# Altium PCB UpperV1.1.PcbDoc
Units mil, origin at the board's own origin, x right, y up, seen from the top; angles counter-clockwise.
Board outline 3366.33 x 5314.96 mil, 2 copper layers (Top Layer, Bottom Layer); 95 components, 77 nets, 392 pads, 49 vias.
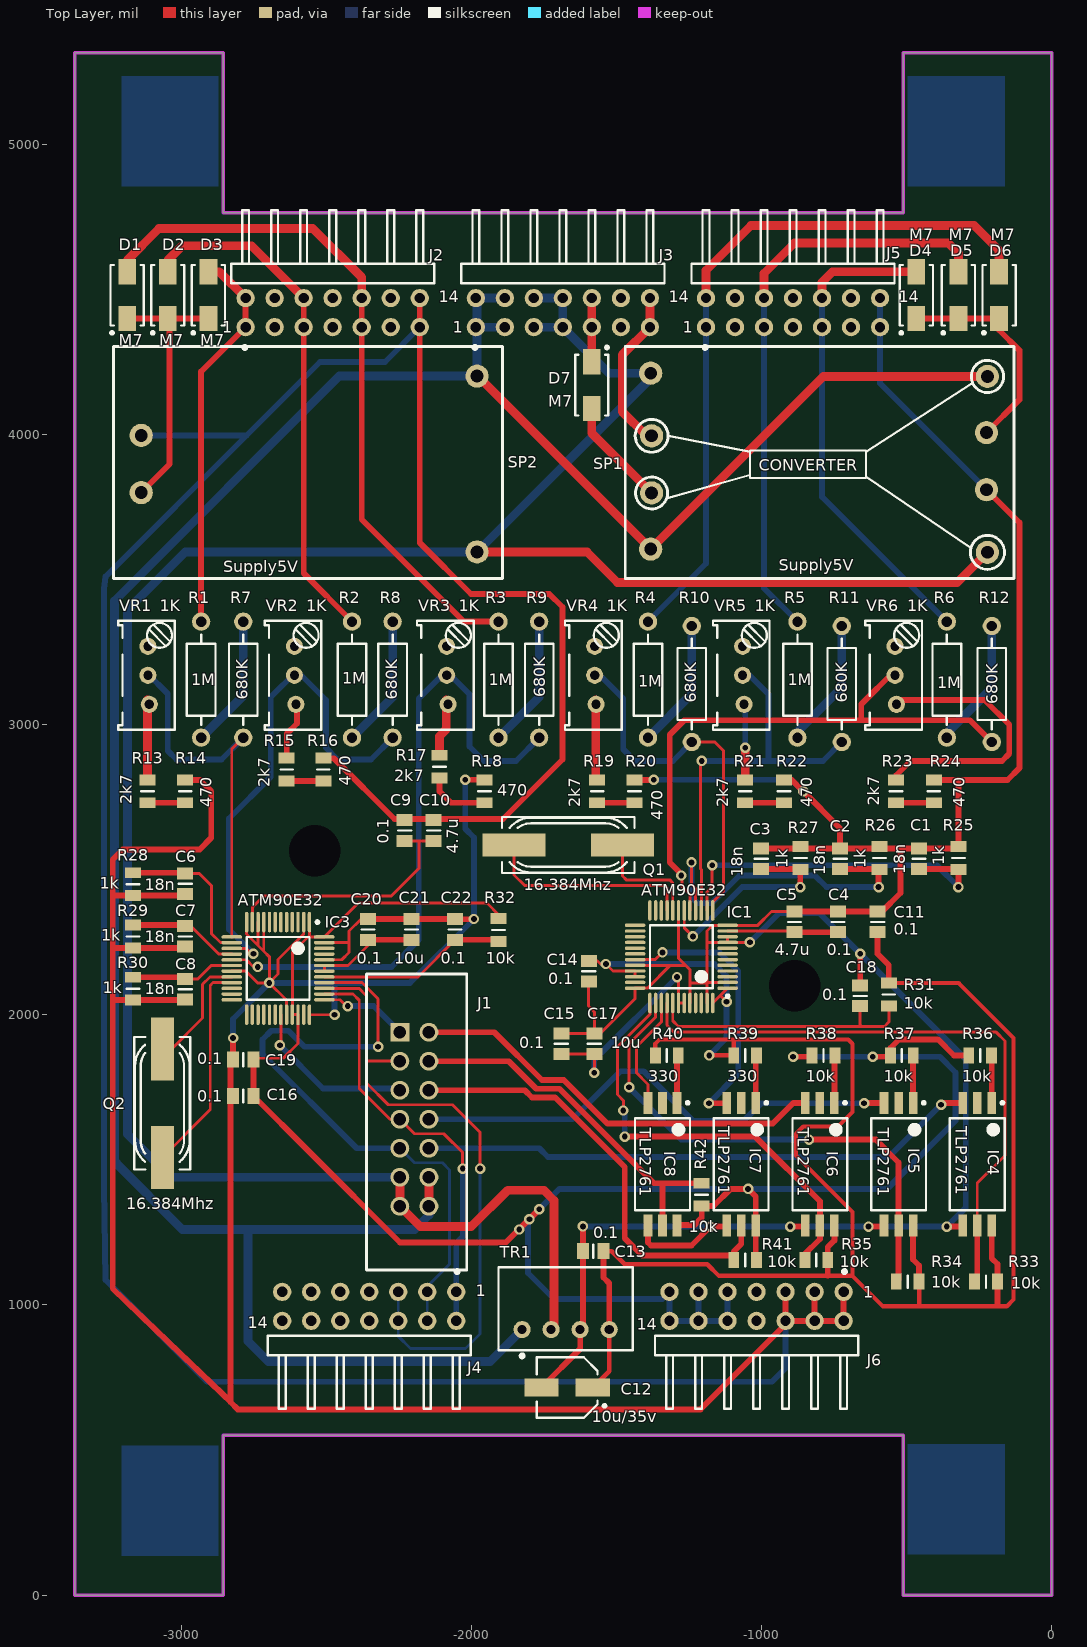
[diagram p0: Top Layer view]
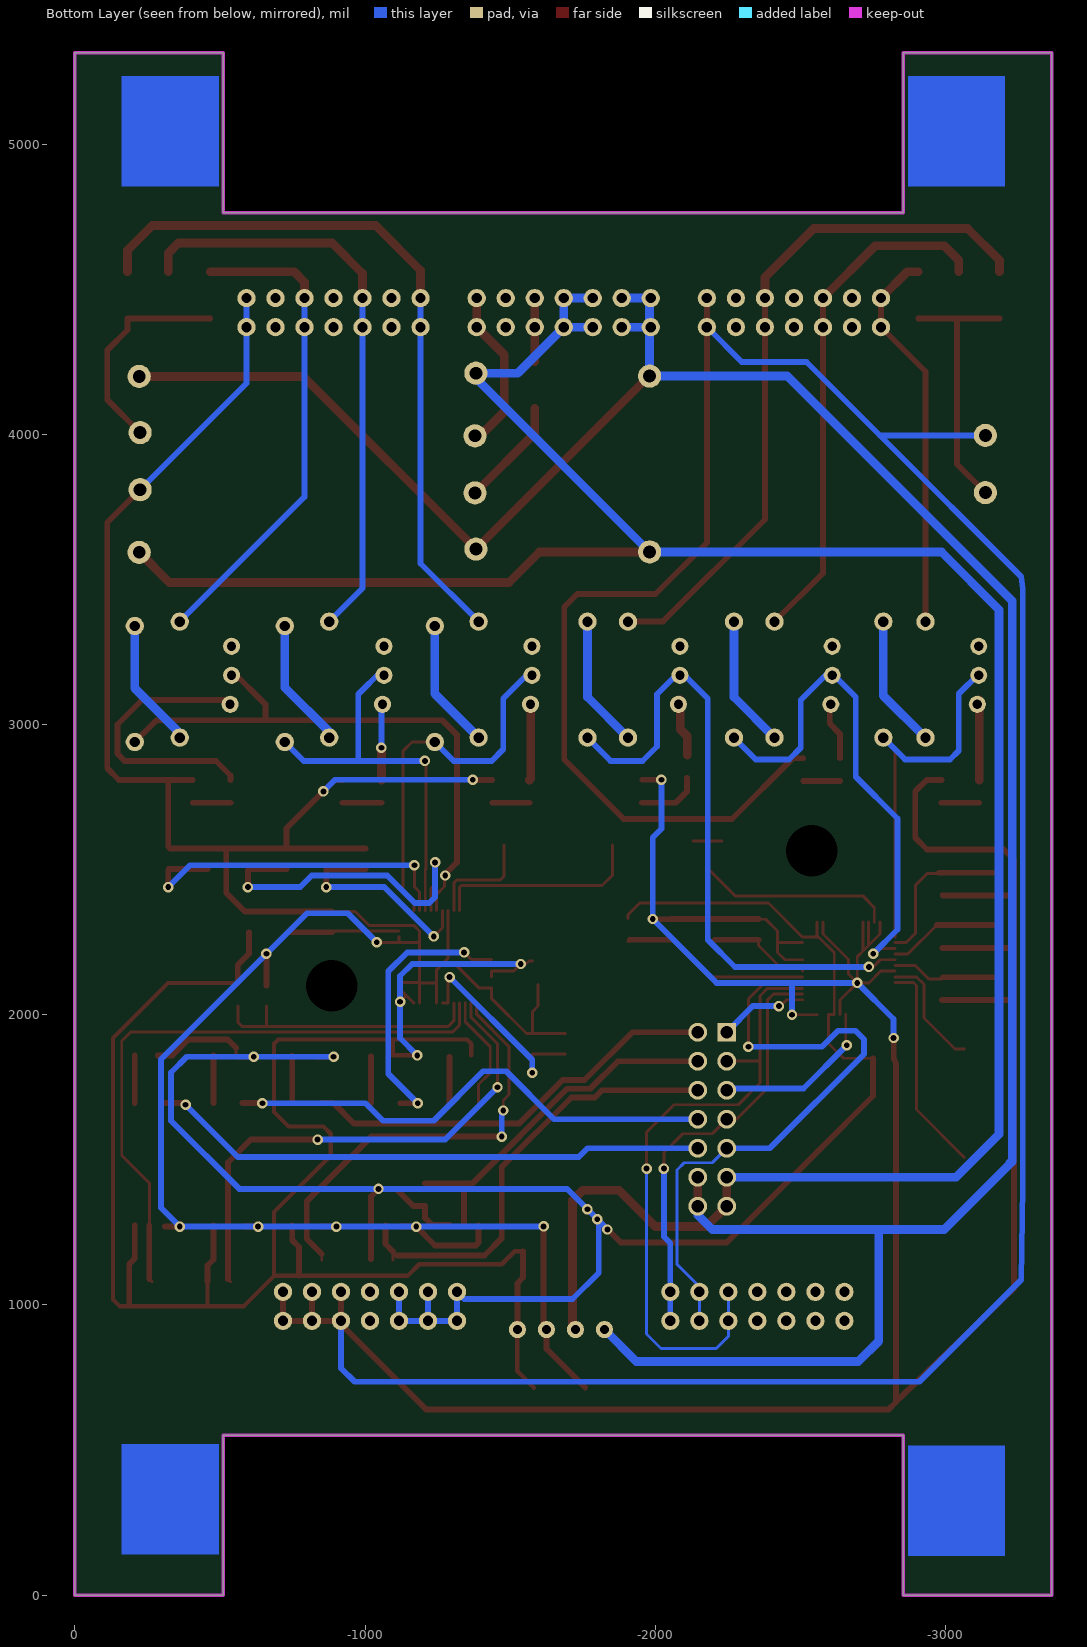
[diagram p1: Bottom Layer view, seen from below]
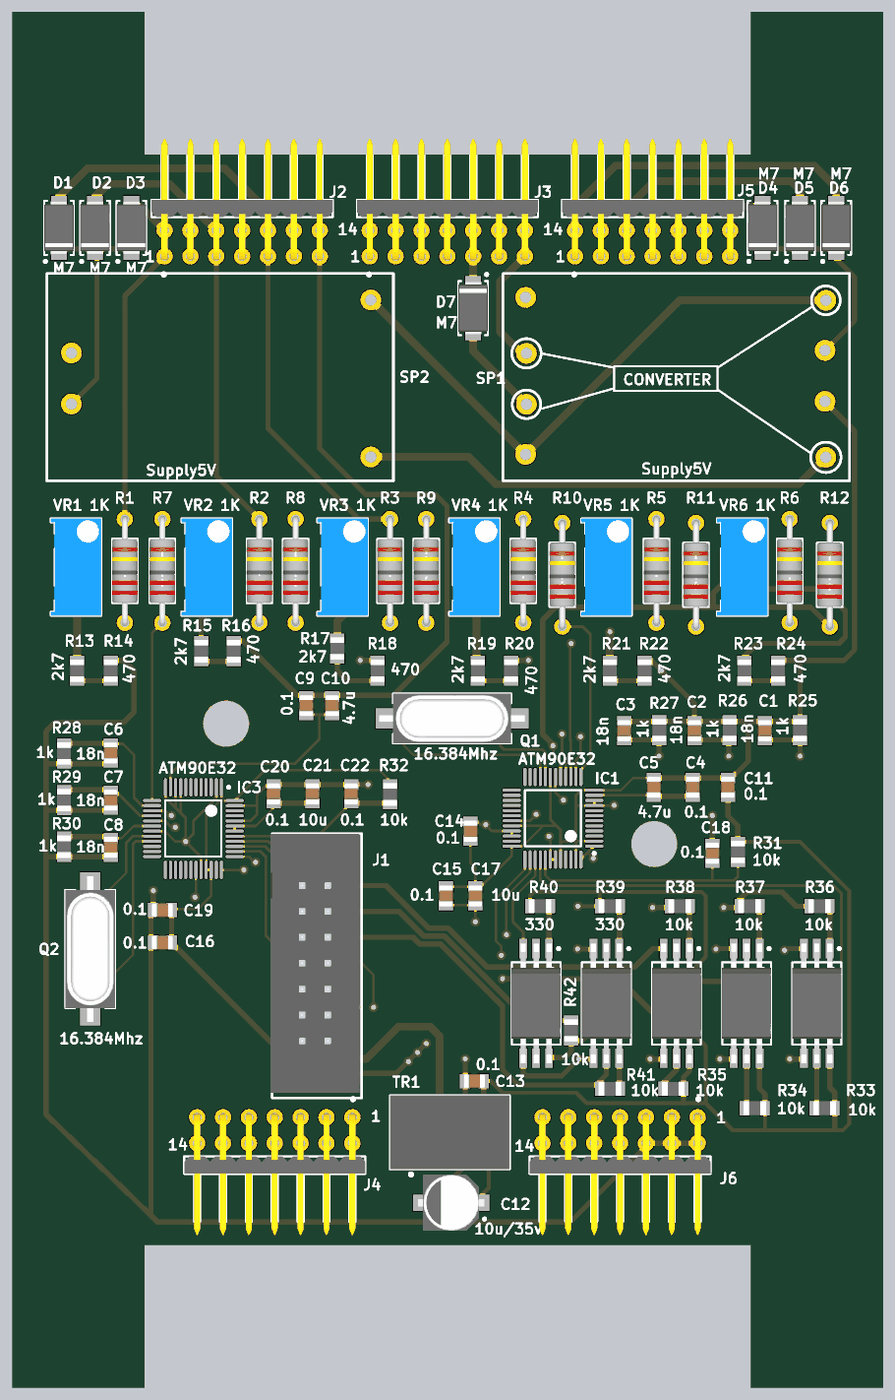
[diagram p2: 3D render of the assembled board from above, using the file's embedded part models]

## Layer stack, top to bottom
Top Solder: solder mask 0.4, Solder Resist, Dk 3.5
Top Layer: signal copper 1.4
Dielectric 1: dielectric 12.6, FR-4, Dk 4.8
Bottom Layer: signal copper 1.4
Bottom Solder: solder mask 0.4, Solder Resist, Dk 3.5

## Board outline
-3366.33,0 -3366.33,5314.96 -2854.52,5314.96 -2854.52,4763.78 -512,4763.78 -512,5314.96 0,5314.96 0,0 -511.81,0 -511.81,551.18 -2854.33,551.18 -2854.33,0

## Design rules (kind name [scope] priority, off if disabled: settings)
Clearance [All] p1: gap=7 ignorepadtopadclearanceinfootprint=FALSE
PolygonConnect [All] p1: connectstyle=Relief reliefconductorwidth=10 reliefentries=4 polygonreliefangle="90 Angle" airgapwidth=10
RoutingVias [All] p1: holewidth=28 width=50 viastyle="Through Hole" minholewidth=28 minwidth=50 maxholewidth=28 maxwidth=50
SolderMaskExpansion [All] p1: expansion=4
Width [All] p1: maxlimit=300 minlimit=7 preferedwidth=10
30 further rules are at their usual default settings.

## Components (designator, comment, footprint, x,y, rotation, side; value= is the part's Value field where it differs from the comment)
C1 "18n" CAPC2012X135N -457.33,2538.03 r270 top value=18nF
C2 "18n" CAPC2012X135N -729.33,2538.03 r270 top value=18nF
C3 "18n" CAPC2012X135N -1001.33,2538.03 r270 top value=18nF
C4 "0.1" CAPC2012X135N -736.33,2320 r90 top value=100nF
C5 "4.7u" CAPC2012X135N -886.33,2320 r270 top value=4.7uF
C6 "18n" CAPC2012X135N -2986.33,2451.97 r90 top value=18nF
C7 "18n" CAPC2012X135N -2986.33,2270 r90 top value=18nF
C8 "18n" CAPC2012X135N -2986.33,2088.03 r90 top value=18nF
C9 "0.1" CAPC2012X135N -2230,2635 r90 top value=100nF
C10 "4.7u" CAPC2012X135N -2130,2635 r270 top value=4.7uF
C11 "0.1" CAPC2012X135N -600,2320 r270 top value=100nF
C12 "10u/35v" CAPAE530X540N -1670,715 r180 top value=10uF
C13 "0.1" CAPC2012X135N -1580,1185 r180 top value=100nF
C14 "0.1" CAPC2012X135N -1595,2150 r270 top value=100nF
C15 "0.1" CAPC2012X135N -1690,1900 r270 top value=100nF
C16 "0.1" CAPC2012X135N -2786.33,1720 r0 top value=100nF
C17 "10u" CAPC2012X135N -1576.33,1900 r90 top value=10uF
C18 "0.1" CAPC2012X135N -660,2065 r270 top value=100nF
C19 "0.1" CAPC2012X135N -2786.33,1845 r180 top value=100nF
C20 "0.1" CAPC2012X135N -2356.33,2293.94 r270 top value=100nF
C21 "10u" CAPC2012X135N -2206.33,2293.94 r90 top value=10uF
C22 "0.1" CAPC2012X135N -2056.33,2293.94 r270 top value=100nF
D1 "M7" DIOM5027X244N -3186.33,4480 r90 top
D2 "M7" DIOM5027X244N -3046.33,4480 r90 top (schematic designator D1)
D3 "M7" DIOM5027X244N -2906.33,4480 r90 top (schematic designator D1)
D4 "M7" DIOM5027X244N -466.33,4480 r90 top (schematic designator D1)
D5 "M7" DIOM5027X244N -321.33,4480 r90 top (schematic designator D1)
D6 "M7" DIOM5027X244N -181.33,4480 r90 top (schematic designator D1)
D7 "M7" DIOM5027X244N -1585,4170 r270 top (schematic designator D1)
IC1 "ATM90E32" LQFP48_N -1276.33,2200 r180 top
IC3 "ATM90E32" LQFP48_N -2666.33,2160 r270 top
IC4 "TLP2761" SOIC127P1150X360-6N -256.33,1485 r270 top
IC5 "TLP2761" SOIC127P1150X360-6N -527.58,1485 r270 top
IC6 "TLP2761" SOIC127P1150X360-6N -798.83,1485 r270 top
IC7 "TLP2761" SOIC127P1150X360-6N -1070.08,1485 r270 top
IC8 "TLP2761" SOIC127P1150X360-6N -1341.33,1485 r270 top
J1 "30314-6002HB" SHDR14W64P254_2X7_2540X878X955P -2246.33,1940 r270 top
J2 "7x2" STELVIO-KONTEK_3910401114400 -2478,4420 r0 top locked
J3 "7x2" STELVIO-KONTEK_3910401114400 -1684.66,4420 r0 top locked
J4 "7x2" STELVIO-KONTEK_3910401114400 -2352,995 r180 top locked
J5 "7x2" STELVIO-KONTEK_3910401114400 -891.33,4420 r0 top locked
J6 "7x2" STELVIO-KONTEK_3910401114400 -1017,995 r180 top locked
Q1 "16.384Mhz" XTAL1160X490X430 -1666.33,2585 r180 top value=6MHz
Q2 "16.384Mhz" XTAL1160X490X430 -3065,1695 r270 top value=6MHz
R1 "1M" RES1016-630X250 -2931.33,3155 r270 top
R2 "1M" RES1016-630X250 -2411.33,3155 r270 top
R3 "1M" RES1016-630X250 -1906.33,3155 r270 top
R4 "1M" RES1016-630X250 -1391.33,3155 r270 top
R5 "1M" RES1016-630X250 -876.33,3155 r270 top
R6 "1M" RES1016-630X250 -361.33,3155 r270 top
R7 "680K" RES1016-630X250 -2786.33,3155 r270 top value=680k
R8 "680K" RES1016-630X250 -2271.33,3155 r270 top value=680k
R9 "680K" RES1016-630X250 -1766.33,3155 r270 top value=680k
R10 "680K" RES1016-630X250 -1240.33,3140 r270 top value=680k
R11 "680K" RES1016-630X250 -723.33,3140 r270 top value=680k
R12 "680K" RES1016-630X250 -206.33,3140 r270 top value=680k
R13 "2k7" RESC2012X60N -3116.33,2770 r90 top
R14 "470" RESC2012X60N -2986.33,2770 r270 top
R15 "2k7" RESC2012X60N -2636.33,2845 r90 top
R16 "470" RESC2012X60N -2510.33,2845 r270 top
R17 "2k7" RESC2012X60N -2110,2855 r90 top
R18 "470" RESC2012X60N -1954.33,2770 r270 top
R19 "2k7" RESC2012X60N -1566.33,2770 r90 top
R20 "470" RESC2012X60N -1438.33,2770 r270 top
R21 "2k7" RESC2012X60N -1056.33,2770 r90 top
R22 "470" RESC2012X60N -922.33,2770 r270 top
R23 "2k7" RESC2012X60N -536.33,2770 r90 top
R24 "470" RESC2012X60N -406.33,2770 r270 top
R25 "1k" RESC2012X60N -321.33,2540 r270 top
R26 "1k" RESC2012X60N -593.33,2540 r270 top
R27 "1k" RESC2012X60N -865.33,2540 r270 top
R28 "1k" RESC2012X60N -3166.33,2450 r90 top
R29 "1k" RESC2012X60N -3166.33,2270 r90 top
R30 "1k" RESC2012X60N -3166.33,2090 r90 top
R31 "10k" RESC2012X60N -561.33,2070 r270 top
R32 "10k" RESC2012X60N -1906.33,2291.97 r90 top
R33 "10k" RESC2012X60N -226.33,1080 r0 top
R34 "10k" RESC2012X60N -496.33,1080 r0 top
R35 "10k" RESC2012X60N -811.33,1155 r0 top
R36 "10k" RESC2012X60N -246.33,1860 r180 top
R37 "10k" RESC2012X60N -516.33,1860 r180 top
R38 "10k" RESC2012X60N -786.33,1860 r180 top
R39 "330" RESC2012X60N -1056.33,1860 r180 top
R40 "330" RESC2012X60N -1326.33,1860 r180 top
R41 "10k" RESC2012X60N -1056.33,1155 r0 top
R42 "10k" RESC2012X60N -1206.33,1380 r270 top
SP1 "Supply5V" Supply5V -224.64,3903.15 r180 top
SP2 "Supply5V" Supply5V -3138.02,3903.15 r0 top (schematic designator SP1)
TR1 "Comment" DCDC_TRACO_TME24 -1675,915 r0 top
VR1 "1K" TRIM_BOURNS_3296Y -3120,3170 r270 top
VR2 "1K" TRIM_BOURNS_3296Y -2615,3170 r270 top
VR3 "1K" TRIM_BOURNS_3296Y -2090,3170 r270 top
VR4 "1K" TRIM_BOURNS_3296Y -1580,3170 r270 top
VR5 "1K" TRIM_BOURNS_3296Y -1070,3170 r270 top
VR6 "1K" TRIM_BOURNS_3296Y -545,3170 r270 top

## Footprints (in the part's own frame and the unit in brackets; to place one, negate y for a bottom-side part, rotate by r counter-clockwise, add the part's x,y. Pads: shape width x height; smd on the part's side, far side on the other; paste and mask are expansions set on the pad)
CAPAE530X540N [mm] "Capacitor, Aluminium Electrolytric, 5.3mm L X 5.3mm W X 5.4mm H, IPC Medium Density"
  rect 3x1.6 smd: 1(-2.25,0) 2(2.25,0)
  silkscreen extent -3.4,-2.65 2.65,2.65, body extent -3.25,-2.75 3.25,2.75, height 5.7
CAPC2012X135N [mm] "Chip Capacitor, Body 2.0x1.25mm, IPC Medium Density"
  rect 1.05x1.4 smd: 1(-0.9,0) 2(0.9,0)
  silkscreen extent 0,-0.58 0,0.58, body extent -1.05,-0.67 1.05,0.68, height 1.25
DCDC_TRACO_TME24 [mm] "TME Series , Body 11.75x7.25mm, SIP-4 Package"
  round 1.5 hole 0.8: 1(-3.81,0) 2(-1.27,0) 3(1.27,0) 4(3.81,0)
  silkscreen extent -5.88,-2.45 5.88,5.45, body extent -5.87,-1.8 5.88,5.45, height 10.45
DIOM5027X244N [mm] "DO-214-AC/SMA  Molded Diode, Body 5.0x2.7mm, IPC Medium Density"
  rect 2.2x1.55 smd: 1(-2.05,0) 2(2.05,0)
  silkscreen extent -3.42,-1.45 2.65,1.45, body extent -2.6,-1.45 2.6,1.45, height 2.44
LQFP48_N [mm] "Thin QFP, 48-Leads, Body 7x7mm, Pitch 0.5mm, IPC Medium Density"
  oval 1.8x0.3 smd: 1(-4.05,2.75) 2(-4.05,2.25) 3(-4.05,1.75) 4(-4.05,1.25) 5(-4.05,0.75) 6(-4.05,0.25) 7(-4.05,-0.25) 8(-4.05,-0.75) 9(-4.05,-1.25) 10(-4.05,-1.75) 11(-4.05,-2.25) 12(-4.05,-2.75) 25(4.05,-2.75) 26(4.05,-2.25) 27(4.05,-1.75) 28(4.05,-1.25) 29(4.05,-0.75) 30(4.05,-0.25) 31(4.05,0.25) 32(4.05,0.75) 33(4.05,1.25) 34(4.05,1.75) 35(4.05,2.25) 36(4.05,2.75)
  oval 0.3x1.8 smd: 13(-2.75,-4.05) 14(-2.25,-4.05) 15(-1.75,-4.05) 16(-1.25,-4.05) 17(-0.75,-4.05) 18(-0.25,-4.05) 19(0.25,-4.05) 20(0.75,-4.05) 21(1.25,-4.05) 22(1.75,-4.05) 23(2.25,-4.05) 24(2.75,-4.05) 37(2.75,4.05) 38(2.25,4.05) 39(1.75,4.05) 40(1.25,4.05) 41(0.75,4.05) 42(0.25,4.05) 43(-0.25,4.05) 44(-0.75,4.05) 45(-1.25,4.05) 46(-1.75,4.05) 47(-2.25,4.05) 48(-2.75,4.05)
  silkscreen extent -4.18,-2.75 2.75,3.57, body extent -3.5,-3.5 3.5,3.5, height 1.6
RES1016-630X250 [mm] "Resistor, Axial, Pad spacing 10.16 mm - Body Lengh 6.3mm X Body Diameter 2.5mm"
  round 1.6 hole 0.9: 1(-5.08,0) 2(5.08,0)
  silkscreen extent -3.95,-1.25 3.95,1.25, body extent -5.38,-1.27 5.38,1.26, height 2.51
RESC2012X60N [mm] "Chip Resistor, EIA 0805, Metric 2012, Body 2.0x1.2mm, IPC Medium Density"
  rect 0.95x1.4 smd: 1(-1,0) 2(1,0)
  silkscreen extent 0,-0.55 0,0.55, body extent -1.1,-0.67 1.1,0.68, height 0.6
SHDR14W64P254_2X7_2540X878X955P [mm]
  rect 1.65x1.65 hole 1.1: 1(0,0)
  round 1.65 hole 1.1: 2(0,2.54) 3(2.54,0) 4(2.54,2.54) 5(5.08,0) 6(5.08,2.54) 7(7.62,0) 8(7.62,2.54) 9(10.16,0) 10(10.16,2.54) 11(12.7,0) 12(12.7,2.54) 13(15.24,0) 14(15.24,2.54)
  silkscreen extent -5.08,-2.93 20.83,5.85, body extent -5.08,-3.12 20.32,5.66, height 9.55
SOIC127P1150X360-6N [mm] "SOIC, 1.27mm Pitch; 6 Pin, 6.90mm W X 4.70mm L X 3.60mm H Body, IPC Medium Density"
  rect 1.91x0.76 smd: 1(-5.37,1.27) 2(-5.37,0) 3(-5.37,-1.27) 4(5.37,-1.27) 5(5.37,0) 6(5.37,1.27)
  silkscreen extent -5.49,-2.4 4.02,2.4, body extent -5.87,-2.42 5.88,2.42, height 3.6
STELVIO-KONTEK_3910401114400 [mm] "14 Contacts - Pitch 2.54mm - Dual Row Right Angle Strip Header - Insulator 1.7mm"
  round 1.6 hole 0.9: 1(-7.62,-1.27) 2(-7.62,1.27) 3(-5.08,-1.27) 4(-5.08,1.27) 5(-2.54,-1.27) 6(-2.54,1.27) 7(0,-1.27) 8(0,1.27) 9(2.54,-1.27) 10(2.54,1.27) 11(5.08,-1.27) 12(5.08,1.27) 13(7.62,-1.27) 14(7.62,1.27)
  silkscreen extent -8.89,-3.2 8.89,8.97, body extent -8.89,-1.57 8.89,10.27, height 5.57
Supply5V [mil]
  round 80 hole 44: 1(0,-103.43) 2(0,93.43) 3(1157.48,298.15) 4(1157.48,-308.15)
  silkscreen extent -95,-400 1245,400
TRIM_BOURNS_3296Y [mm] "Trimming Potentiometer BOURNS 3296Y Series"
  round 1.5 hole 0.8: 1(-2.54,0.127) 2(0,0.127) 3(2.54,0.254)
  silkscreen extent -4.77,-2.48 4.77,2.49, body extent -4.76,-2.47 4.77,2.49, height 11.49
XTAL1160X490X430 [mm] "HC49/4H SMX Case, SMD Cristal, Body 11.6x4.9mm"
  rect 5.5x2 smd: 1(-4.75,0) 2(4.75,0)
  silkscreen extent -5.8,-2.45 5.8,2.45, body extent -7.15,-2.45 7.15,2.45, height 4.3

## Part data
C1 C2 C3 C6 C7 C8: library part CC0805_18NF_50V_10%_X7R, "0328-0120-2", Case=0805, Manufacturer=GENERIC, Manufacturer1 ComponentHeight=1.35mm, Manufacturer1 Example=PHYCOMP, Manufacturer1 Part Number=223858615639, Tolerance=±10%, Voltage=50V, Author="CERN DEM JLC", Component Type=Standard, CreateDate=3/12/2550, HelpURL=\\cern.ch\dfs\Applications\Altium\Datasheets\CC0805_X7R_PHYCOMP.pdf, LatestRevisionDate=3/12/2550, Manufacturer Part Number=CC0805_18NF_50V_10%_X7R, Mounted=Yes, Part Description="SMD Multilayer Chip Ceramic Capacitor", Part Number=CC0805_18NF_50V_10%_X7R, Pin Count=2, SMD=Yes, Socket=No, Status=Preferred, Table="Capacitors SMD", TC=X7R
C4 C9 C11 C13 C14 C15 C16 C18 C19 C20 C22: library part CC0805_100NF_50V_10%_X7R, "0092-0004-8", Case=0805, Manufacturer=GENERIC, Manufacturer1 ComponentHeight=1.35mm, Manufacturer1 Example=EPCOS, Manufacturer1 Part Number=B37941K5104K62, Tolerance=±10%, Voltage=50V, Author="CERN DEM JLC", Component Type=Standard, CreateDate=3/12/2550, HelpURL=\\cern.ch\dfs\Applications\Altium\Datasheets\CC0805_X7R_EPCOS.pdf, LatestRevisionDate=3/12/2550, Manufacturer Part Number=CC0805_100NF_50V_10%_X7R, Mounted=Yes, Part Description="SMD Multilayer Chip Ceramic Capacitor", Part Number=CC0805_100NF_50V_10%_X7R, Pin Count=2, SMD=Yes, Socket=No, Status=Preferred, Table="Capacitors SMD", TC=X7R
C5 C10: library part CC0805_4.7UF_10V_10%_X5R, "0160-0457-5", Case=0805, Manufacturer=GENERIC, Manufacturer1 ComponentHeight=1.45mm, Manufacturer1 Example=PHYCOMP, Manufacturer1 Part Number=222224013672, Tolerance=±10%, Voltage=10V, Author="CERN DEM JLC", Component Type=Standard, CreateDate=3/12/2550, HelpURL=\\cern.ch\dfs\Applications\Altium\Datasheets\CC0805_X5R_PHYCOMP_HC.pdf, LatestRevisionDate=3/12/2550, Manufacturer Part Number=CC0805_4.7UF_10V_10%_X5R, Mounted=Yes, Part Description="SMD Multilayer Chip Ceramic Capacitor", Part Number=CC0805_4.7UF_10V_10%_X5R, Pin Count=2, SMD=Yes, Socket=No, Status=Preferred, Table="Capacitors SMD", TC=X5R
C12: library part CAE530-540_10UF_35V_20%, "0289-0032-3", Case=C, Manufacturer=GENERIC, Manufacturer1 ComponentHeight=5.8mm, Manufacturer1 Example=PANASONIC, Manufacturer1 Part Number=EEEFK1V100AR, Tolerance=±20%, Voltage=35V, Author="CERN DEM JLC", Component Type=Standard, CreateDate=3/12/2550, HelpURL=\\cern.ch\dfs\Applications\Altium\Datasheets\CAE_PANASONIC_FK.pdf, LatestRevisionDate=3/12/2550, Manufacturer Part Number=CAE530-540_10UF_35V_20%, Mounted=Yes, Part Description="Aluminum Electrolytic SMT Capacitor", Part Number=CAE530-540_10UF_35V_20%, Pin Count=2, SMD=Yes, Socket=No, Status="Not Recommended", Table="Capacitors SMD"
C17 C21: library part CC0805_10UF_10V_10%_X7R, "0328-0108-8", Case=0805, Manufacturer=GENERIC, Manufacturer1 ComponentHeight=1.35mm, Manufacturer1 Example=MURATA, Manufacturer1 Part Number=GRM21BR71A106KE51L, Tolerance=±10%, Voltage=10V, Author="CERN DEM JLC", Component Type=Standard, CreateDate=30/4/2555, HelpURL=\\cern.ch\dfs\Applications\Altium\Datasheets\CC0805_X7R_MURATA.pdf, LatestRevisionDate=30/4/2555, Manufacturer Part Number=CC0805_10UF_10V_10%_X7R, Mounted=Yes, Part Description="SMD Multilayer Chip Ceramic Capacitor", Part Number=CC0805_10UF_10V_10%_X7R, Pin Count=2, SMD=Yes, Socket=No, Status=Preferred, Table="Capacitors SMD", TC=X7R
D1 D2 D3 D4 D5 D6 D7: library part ES1D, "0204-0002-4"
IC4 IC5 IC6 IC7 IC8: library part ACPL-W60L-000E, "0087-0267-8", Case=SOIC6, Manufacturer="AVAGO TECHNOLOGIES", Author="CERN DEM JMW", ComponentHeight=3.6mm, Component Type=Standard, CreateDate=26/2/2557, Device=ACPL-W60L-000E, HelpURL=\\cern.ch\dfs\Applications\Altium\Datasheets\ACPL-W60L-000E.pdf, LatestRevisionDate=26/2/2557, Manufacturer Part Number=ACPL-W60L-000E, Mounted=Yes, PackageDescription="SOIC, 1.27mm Pitch; 6 Pin, 6.90mm W X 4.70mm L X 3.60mm H Body, IPC Medium Density", Part Description="High Speed LVTTL Compatible 3.3Volt/5Volt Optocoupler", Part Number=ACPL-W60L-000E, Pin Count=6, SMD=Yes, Socket=No, Table=Optocouplers
J1: "Connector", Manufacturer_Name=3M, Datasheet Link=https://componentsearchengine.com/Datasheets/2/30314-6002HB.pdf, Height=9.554mm, Manufacturer_Part_Number=30314-6002HB
J2 J3 J4 J5 J6: library part STELVIO-KONTEK_3910401114400, "Connector 14 Male", Manufacturer=STELVIO-KONTEK, Manufacturer Part Number=3910401114400, Author="CERN DEM JLC", ComponentHeight=5.7mm, Component Type=Standard, CreateDate=29/8/2556, Family="Header 14", HelpURL=\\cern.ch\dfs\Applications\Altium\Datasheets\STELVIO-KONTEK_3910401114400.pdf, LatestRevisionDate=29/8/2556, Mounted=Yes, Part Description="14 Contacts - Pitch 2.54mm - Dual Row Right Angle Strip Header - Insulator 1.7mm", Part Number=STELVIO-KONTEK_3910401114400, Pin Count=14, SMD=No, Socket=No, Status=None, Table="STELVIO-KONTEK COMATEL"
Q1 Q2: library part "XTAL_6MHZ_RAKON_HC49/4H SMX_20/50/10/16", "0099-0185-7", Manufacturer=RAKON, Manufacturer Part Number="6MHz HC49/4H SMX 20/50/10/16", Author="CERN DEM JMW", ComponentHeight=4.3mm, Component Type=Standard, CreateDate=7/10/2551, HelpURL=\\cern.ch\dfs\Applications\Altium\Datasheets\XTAL_RAKON_HC49-4HSMX.pdf, LatestRevisionDate=3/6/2553, Mounted=Yes, PackageDescription="HC49/4H SMX Case, SMD Cristal, Body 11.6x4.9mm", Part Description="Tolerance:± 20ppm, Stability:± 50ppm, -10°C to +70°C, 16pF, Surface Mount Quartz Crystal, HC49/4HSMX Serie", Part Number="XTAL_6MHZ_RAKON_HC49/4H SMX_20/50/10/16", Pin Count=2, SMD=Yes, Socket=No, Table="Crystals & Oscillators"
R1 R2 R3 R4 R5 R6: library part RMF_1M_1%_0.6W_50PPM_1016-630X250, "0150-2831-6", Case="LS10.16 L6.3 x D2.5", Manufacturer=GENERIC, Manufacturer1 ComponentHeight=2.5mm, Manufacturer1 Example="VISHAY BEYSCHLAG", Manufacturer1 Part Number=MBB02070C1004FCT00, Power=0.6W, Tolerance=±1%, Author="CERN DEM JLC", ComponentHeight=2.5mm, Component Type=Standard, CreateDate=4/12/2550, HelpURL=\\cern.ch\dfs\Applications\Altium\Datasheets\RMF_VISHAY_MBB0207.pdf, LatestRevisionDate=7/4/2551, Manufacturer Part Number=RMF_1M_1%_0.6W_50PPM_1016-630X250, Mounted=Yes, Part Description="Leaded Metal Film Resistor", Part Number=RMF_1M_1%_0.6W_50PPM_1016-630X250, Pin Count=2, SMD=No, Socket=No, Status=Preferred, Table="Resistors THD", TC=±50ppm/°C
R7 R8 R9 R10 R11 R12: library part RMF_680K_1%_0.6W_50PPM_1016-630X250, "0150-0219-0", Case="LS10.16 L6.3 x D2.5", Manufacturer=GENERIC, Manufacturer1 ComponentHeight=2.5mm, Manufacturer1 Example="VISHAY BEYSCHLAG", Manufacturer1 Part Number=MBB02070C6803FCT00, Power=0.6W, Tolerance=±1%, Author="CERN DEM JLC", ComponentHeight=2.5mm, Component Type=Standard, CreateDate=4/12/2550, HelpURL=\\cern.ch\dfs\Applications\Altium\Datasheets\RMF_VISHAY_MBB0207.pdf, LatestRevisionDate=7/4/2551, Manufacturer Part Number=RMF_680K_1%_0.6W_50PPM_1016-630X250, Mounted=Yes, Part Description="Leaded Metal Film Resistor", Part Number=RMF_680K_1%_0.6W_50PPM_1016-630X250, Pin Count=2, SMD=No, Socket=No, Status=Preferred, Table="Resistors THD", TC=±50ppm/°C
R13 R15 R17 R19 R21 R23: library part R0805_2K7_0.1%_0.125W_25PPM, "0150-3998-7", Case=0805, Manufacturer=GENERIC, Manufacturer1 ComponentHeight=0.6mm, Manufacturer1 Example=PANASONIC, Manufacturer1 Part Number=ERA6AEB272V, Power=0.125W, Tolerance=±0.1%, Author="CERN DEM JLC", Component Type=Standard, CreateDate=25/10/2554, HelpURL=\\cern.ch\dfs\Applications\Altium\Datasheets\R0805_PANASONIC_ERA.pdf, LatestRevisionDate=25/10/2554, Manufacturer Part Number=R0805_2K7_0.1%_0.125W_25PPM, Mounted=Yes, Part Description="Thin Film Chip Resistor", Part Number=R0805_2K7_0.1%_0.125W_25PPM, Pin Count=2, SMD=Yes, Socket=No, Status="Not recommended", Table="Resistors SMD", TC=±25ppm
R14 R16 R18 R20 R22 R24: library part R0805_470R_1%_0.125W_100PPM, "0150-1892-7", Case=0805, Manufacturer=GENERIC, Manufacturer1 ComponentHeight=0.6mm, Manufacturer1 Example="NIC COMPONENT", Manufacturer1 Part Number=NRC10F4700TRF, Power=0.125W, Tolerance=±1%, Author="CERN DEM JLC", Component Type=Standard, CreateDate=3/12/2550, HelpURL=\\cern.ch\dfs\Applications\Altium\Datasheets\R0805_NIC_NRC.pdf, LatestRevisionDate=13/3/2551, Manufacturer Part Number=R0805_470R_1%_0.125W_100PPM, Mounted=Yes, Part Description="General Purpose Thick Film Chip Resistor", Part Number=R0805_470R_1%_0.125W_100PPM, Pin Count=2, SMD=Yes, Socket=No, Status=Preferred, Table="Resistors SMD", TC=±100ppm/°C
R25 R26 R27 R28 R29 R30: library part R0805_1K_1%_0.125W_100PPM, "0176-0313-5", Case=0805, Manufacturer=GENERIC, Manufacturer1 ComponentHeight=0.6mm, Manufacturer1 Example="NIC COMPONENT", Manufacturer1 Part Number=NRC10F1001TRF, Power=0.125W, Tolerance=±1%, Author="CERN DEM JLC", Component Type=Standard, CreateDate=3/12/2550, HelpURL=\\cern.ch\dfs\Applications\Altium\Datasheets\R0805_NIC_NRC.pdf, LatestRevisionDate=13/3/2551, Manufacturer Part Number=R0805_1K_1%_0.125W_100PPM, Mounted=Yes, Part Description="General Purpose Thick Film Chip Resistor", Part Number=R0805_1K_1%_0.125W_100PPM, Pin Count=2, SMD=Yes, Socket=No, Status=Preferred, Table="Resistors SMD", TC=±100ppm/°C
R31 R32 R33 R34 R35 R36 R37 R38 R41 R42: library part R0805_10K_0.1%_0.1W_10PPM, "0176-0426-3", Case=0805, Manufacturer=GENERIC, Manufacturer1 ComponentHeight=0.6mm, Manufacturer1 Example="TYCO HOLSWORTHY", Manufacturer1 Part Number=RN73C2A10KBTG, Power=0.1W, Tolerance=±0.1%, Author="CERN DEM JLC", Component Type=Standard, CreateDate=3/12/2550, HelpURL=\\cern.ch\dfs\Applications\Altium\Datasheets\R0805_Tyco_RN73.pdf, LatestRevisionDate=13/3/2551, Manufacturer Part Number=R0805_10K_0.1%_0.1W_10PPM, Mounted=Yes, Part Description="Thin Film Chip Resistor", Part Number=R0805_10K_0.1%_0.1W_10PPM, Pin Count=2, SMD=Yes, Socket=No, Status="Not recommended", Table="Resistors SMD", TC=±10ppm
R39 R40: library part R0805_330R_1%_0.125W_100PPM, "0150-3297-4", Case=0805, Manufacturer=GENERIC, Manufacturer1 ComponentHeight=0.6mm, Manufacturer1 Example="NIC COMPONENT", Manufacturer1 Part Number=NRC10F3300TRF, Power=0.125W, Tolerance=±1%, Author="CERN DEM JLC", Component Type=Standard, CreateDate=3/12/2550, HelpURL=\\cern.ch\dfs\Applications\Altium\Datasheets\R0805_NIC_NRC.pdf, LatestRevisionDate=13/3/2551, Manufacturer Part Number=R0805_330R_1%_0.125W_100PPM, Mounted=Yes, Part Description="General Purpose Thick Film Chip Resistor", Part Number=R0805_330R_1%_0.125W_100PPM, Pin Count=2, SMD=Yes, Socket=No, Status=Preferred, Table="Resistors SMD", TC=±100ppm/°C
TR1: library part "TME 2405S", "0658-0026-9 Isolated"
VR1 VR2 VR3 VR4 VR5 VR6: library part TRIM_25T_1M_BOURNS_3296Y-1-105LF

## Free pads (board coordinates)
  round 60 hole 177.17: 0(-2540,2565) 0(-885,2100)
  round 80 hole 44: 1(-221.33,4200) 2(-221.33,3593.7) 3(-1378.81,3995.28) 4(-1378.81,3798.42)

## Via types
v1: diameter 36, hole 20, Top Layer to Bottom Layer, tented both sides, 49 vias

## Nets (pads, with @x,y where several pads share a name; then routed paths per layer and width w, separated by ;. In a path a pad name is that pad's centre, name@x,y a point inside that pad or via, vN(x,y) a via of type N, cw(c..) or ccw(c..) an arc to the next point about the centre after c; other vN are vias at no path point)
3.3_V1: C16.2 C19.1 IC3.1 IC3.33 IC3.34 IC3.48 IC7.6 IC8.6 J6.9 J6.10 J6.11 J6.12 J6.13 J6.14 R32.2 R36.2 R37.2 R38.2 R41.2 R42.2 | length 7416.7
  Top Layer w10: C19.1@-2750.9,1850 -2648.53,1850 -2597.43,1901.1 IC3.34 IC3.33 -2617.12,2214.21 -2563.06,2268.27 ; IC3.1 -2558.06,2273.27 -2563.06,2268.27 ; R32.2 -1906.33,2345 -1946.33,2385 -2390.15,2385 IC3.48 -2563.06,2268.27 ; IC8.6 IC8.6@-1291.33,1275 ; R41.2@-1020.08,1158.12 R41.2 ; R38.2@-830.7,1855 R38.2 ; R37.2@-560.7,1855 R37.2 R37.2@-555.7,1885.63
  Top Layer w20: C19.1@-2750.9,1850 C19.1 C16.2 -2560.9,1530 -2560.9,1529.57 -2246.33,1215 -1881.33,1215 v1(-1766.33,1330) ; IC8.6@-1291.33,1275 -1231.33,1275 -1206.33,1300 R42.2 -1165.7,1340.63 -1106.33,1400 v1(-1046.33,1400) -1020.08,1373.75 IC7.6 R41.2@-1020.08,1158.12 ; v1(-891.33,1855) R38.2@-830.7,1855 ; v1(-616.33,1855) R37.2@-560.7,1855 ; R37.2@-555.7,1885.63 -526.33,1915 -391.33,1915 -336.33,1860 R36.2
  Bottom Layer w20: v1@-1835,1261.33 v1(-1766.33,1330) ; v1@-1795,1295 -1805,1285 -1805,1110 -1715,1020 -1342,1020 J6.13 J6.14 J6.12 ; v1@-1766.33,1330.67 v1(-1766.33,1330) ; J6.11 J6.12 ; J6.9 J6.10 J6.12 ; v1(-891.33,1855) v1(-616.33,1855) -385,1855 -331.33,1801.33 -331.33,1635 -566.33,1400 v1(-1046.33,1400) -1696.33,1400 v1(-1766.33,1330)
  other v1: -1835,1260 -1800,1295
3.3_V2: C11.2 C12.1 C13.1 C14.1 IC1.1 IC1.33 IC1.34 IC1.48 IC4.6 IC5.6 IC6.6 R31.1 R33.2 R34.2 R35.2 R39.2 R40.2 TR1.4 | length 7271.5
  Top Layer w10: C14.1@-1576.33,2185.43 -1565.43,2185.43 -1555,2175 v1(-1536.33,2175) -1512.12,2150.79 IC1.33 IC1.34 ; IC1.48 -1142.04,2066.58 ; v1(-1120.46,2045) -1142.04,2066.58 ; IC1.1@-1118.61,2090 -1142.04,2066.58 ; -771.96,1100.63 -771.33,1100 ; -456.96,995.63 -456.33,995 ; -186.33,995 -186.33,1000
  Top Layer w15: C12.1 -1525,771.42 TR1.4 ; C13.1 -1515.9,1185 -1471.33,1140.43 -1186.76,1140.43 -1146.33,1100 -771.33,1100 -686.33,1100 ; R40.2 -1365.7,1900.63 -1351.33,1915 -1096.33,1915 ; v1(-1180,1860) R39.2 -1095.7,1914.37 -1096.33,1915 ; R31.1 -320.7,2109.37 -131.33,1920 -131.33,1018.67 -155,995 -186.33,995 -456.33,995 -581.33,995 -686.33,1100 ; -456.96,995.63 R34.2 ; -1096.33,1915 -701.33,1915 -686.33,1900 -686.33,1665 -736.33,1615 -856.33,1615 -881.33,1590 -881.33,1515 -686.33,1320 -686.33,1100
  Top Layer w20: C13.1 -1544.57,1094.57 -1525,1075 TR1.4 ; -771.96,1100.63 R35.2 -771.96,1199.37 -748.83,1222.5 IC6.6 ; C11.2 -600,2210 -561.33,2171.33 R31.1 ; IC5.6 -477.58,1156.25 -456.96,1135.63 R34.2 ; IC4.6 -206.33,1160 -186.96,1140.63 R33.2 -186.96,1000.63 -186.33,1000
  Bottom Layer w20: v1(-1536.33,2175) -1162.25,2175 -1120.46,2133.21 v1(-1120.46,2045) -1120.46,1919.54 v1(-1180,1860)
+12: J1.11 J1.13 J3.5 J3.6 J3.7 J3.8 pad.2 SP1.4 SP2.4 TR1.2 | length 8648.5
  Top Layer w30: J1.11 J1.13 -2176.33,1270 -2000,1270 -1875,1395 -1750,1395 -1715,1360 -1715,925 TR1.2 ; SP2.4 -1601.33,3595 -1496.33,3490 -325.03,3490 pad.2
  Bottom Layer w30: J1.11 -3036.33,1440 -3185,1588.67 -3185,3396.33 -2986.33,3595 SP2.4 -1382.12,4193.42 SP1.4 -1525.96,4211.3 J3.7 ; J3.5 J3.7 ; J3.6 J3.8 J3.7
B+: J3.13 J3.14 pad.3 | length 566.6
  Top Layer w30: J3.14 J3.13 -1480,4274.66 -1480,4078.67 -1396.61,3995.28 pad.3
B-: D7.1 J3.9 J3.10 | length 219.4
  Top Layer w30: D7.1 -1584.66,4251.04 J3.9 J3.10
CLK_S1: IC3.38 J1.7 J4.1 J4.2 | length 1470.4
  Top Layer w10: IC3.38 -2407.75,2071.42 -2386.33,2050 -2386.33,1745.96 -2280.37,1640 J1.7 -2196.33,1590 -2095,1590 -2030,1525 v1(-2030,1470)
  Bottom Layer w20: J4.2 J4.1 -2052,1213 -2030,1235 v1(-2030,1470)
CLK_S2: IC5.3 J1.8 | length 1733
  Top Layer w10: v1(-646.33,1695) -644.91,1696.42 v1@-634.91,1696.42
  Top Layer w20: v1@-634.91,1696.42 IC5.3
  Bottom Layer w20: J1.8 -1651.33,1640 -1486.33,1805 -1406.33,1805 -1236.33,1635 -1061.33,1635 -1001.33,1695 v1(-646.33,1695)
CLKS2_IN: IC1.38 IC5.5 R34.1 | length 1784
  Top Layer w10: v1@-1456.33,1745 v1(-1456.33,1750) -1456.33,1900 -1364.91,1991.42 IC1.38 ; R34.1 R34.1@-527.58,1088.12
  Top Layer w20: v1(-836.33,1570) -606.33,1570 -527.58,1491.25 IC5.5 R34.1@-527.58,1088.12
  Bottom Layer w20: v1(-1456.33,1750) -1276.33,1570 v1(-836.33,1570)
CS_S1: IC3.37 J1.1 | length 306.8
  Top Layer w10: IC3.37 -2453.06,2051.73 -2431.33,2030 v1(-2426.33,2030)
  Bottom Layer w20: v1(-2426.33,2030) -2336.33,2030 J1.1
CS_S2: IC6.3 J1.2 | length 1457.6
  Top Layer w20: J1.2 -1921.33,1940 -1756.33,1775 -1681.33,1775 -1531.33,1625 -961.33,1625 -889.91,1696.42 IC6.3
CSS2_IN: IC1.37 IC6.5 R35.1 | length 1505.8
  Top Layer w10: v1(-1476.33,1670) -1476.33,1705 -1496.33,1725 -1496.33,1890 -1384.6,2001.73 IC1.37 ; R35.1 R35.1@-850.7,1175.63
  Top Layer w20: v1(-1471.33,1580) -1021.33,1580 -798.83,1357.5 IC6.5 -798.83,1227.5 R35.1@-850.7,1175.63
  Bottom Layer w10: v1(-1476.33,1670) v1@-1471.33,1665
  Bottom Layer w20: v1(-1471.33,1580) v1@-1471.33,1665
D7_1: D7.2 pad.4 | length 376.3
  Top Layer w30: D7.2 -1585,4004.61 pad.4
GND_12: J1.12 J1.14 J3.1 J3.2 J3.3 J3.4 pad.1 SP1.3 SP2.3 TR1.1 | length 8964
  Top Layer w30: J1.14 J1.12 ; SP2.3 -1978.42,4201.3 SP1.3 -787.12,4200 pad.1
  Bottom Layer w30: -3222.53,1490 -3222.53,1486.2 ; J1.14 -2146.33,1310 -2196.33,1260 -2780,1260 ; J3.1 J3.1@-1980.54,4370 ; J3.2 J3.4 ; J3.2@-1980.54,4465.88 J3.1@-1980.54,4370 ; J3.3 J3.1@-1980.54,4370 ; TR1.1 -1935,805 -2700,805 -2770,875 -2770,1250 -2780,1260 ; -3222.53,1486.2 -3230,1493.67 -3230,3426.33 -2455.03,4201.3 SP2.3 J3.1@-1980.54,4370 ; -3222.53,1486.2 -2996.33,1260 -2780,1260
GND_V1: C6.1 C7.1 C8.1 C9.2 C10.1 C16.1 C19.2 C20.1 C21.2 C22.1 IC3.2 IC3.9 IC3.10 IC3.12 IC3.19 IC3.32 IC3.36 IC3.44 IC3.47 J2.13 J2.14 J6.1 J6.2 J6.3 J6.4 J6.5 J6.6 R14.1 R16.1 R18.1 R28.1 R29.1 R30.1 SP2.2 | length 20553.7
  Top Layer w10: -3236.33,2230 -3235.7,2230.63 ; C6.1@-2992.23,2410.63 C6.1 ; C7.1@-2990.27,2230.63 C7.1 ; C8.1@-2988.3,2050.63 C8.1 ; IC3.19 -2776.49,2150.16 -2736.33,2110 v1(-2696.33,2110) ; v1@-2821.76,1919.57 v1(-2821.33,1920) ; IC3.12 -2774.6,2278.27 -2735.23,2238.9 ; IC3.10 -2735.23,2238.9 ; IC3.9 -2715.54,2220.79 -2716.33,2220 ; IC3.32 -2636.8,2050.47 v1(-2696.33,2110) ; IC3.2 -2577.75,2278.58 -2666.33,2190 -2666.33,2140 v1(-2696.33,2110) ; IC3.36@-2558.06,2000 v1(-2471.33,2000) ; IC3.44 -2446.8,2189.53 -2421.33,2215 -2421.33,2250 ; IC3.47 -2422.75,2248.58 -2421.33,2250 ; C20.1@-2355.7,2330 C20.1 -2380.63,2329.37 -2421.33,2288.67 -2421.33,2250 ; C22.1@-2056.96,2330 C22.1 ; v1@-1991.96,2329.37 v1(-1991.33,2330) ; R18.1@-1954.96,2810 R18.1 ; -2735.23,2238.9 -2716.33,2220 ; -2716.33,2220 -2696.33,2200 v1(-2696.33,2110)
  Top Layer w20: -3235.7,2230.63 R29.1 C7.1@-2990.27,2230.63 ; -3231.33,2050.63 R30.1 C8.1@-2988.3,2050.63 ; -3231.33,2410.63 R28.1 C6.1@-2992.23,2410.63 ; R14.1 -2935.7,2809.37 -2896.33,2770 -2896.33,2610 -2936.33,2570 -3201.33,2570 -3236.33,2535 -3236.33,2230 -3236.33,1056.33 -2856.76,691.76 -2830,665 ; v1@-2821.76,1919.57 -2821.76,1850 -2830,1831.17 -2830,665 ; R16.1 -2474.37,2884.37 -2265,2675 -1891.33,2675 -1686.33,2880 -1686.33,3405 -1731.33,3450 -2001.33,3450 -2178,3626.67 J2.13 J2.14 ; C20.1@-2355.7,2330 C22.1@-2056.96,2330 ; C22.1 v1@-1991.96,2329.37 ; v1(-2021.33,2810) R18.1@-1954.96,2810 ; J6.5 J6.6 ; J6.3 J6.4 ; J6.1 J6.2 J6.4 ; -2830,665 -2805,640 -1210,640 -917,933 J6.6 ; J6.6 J6.4
  Bottom Layer w20: SP2.2@-3131.45,3990 SP2.2 -2774.75,3996.58 ; v1(-2821.33,1920) -2821.33,1985 v1(-2696.33,2110) -2471.33,2110 ; v1(-2471.33,2000) -2471.33,2110 ; J2.13 -2298,4250 -2521.33,4250 -2774.75,3996.58 ; v1(-2021.33,2810) -2021.33,2641.33 -1991.33,2611.33 v1(-1991.33,2330) -2211.33,2110 -2471.33,2110 ; J6.6 -917,782 -964,735 -2910,735 -3261.33,1086.33 -3266.33,1405 -3266.33,3468.16 -3261.33,3510 -2774.75,3996.58
GND_V2: C1.1 C2.1 C3.1 C4.2 C5.1 C11.1 C12.2 C13.2 C14.2 C15.1 C17.2 C18.1 IC1.2 IC1.9 IC1.10 IC1.12 IC1.19 IC1.32 IC1.36 IC1.44 IC1.47 IC4.4 IC5.4 IC6.4 IC7.4 IC8.4 J5.13 J5.14 R20.1 R22.1 R24.1 R25.1 R26.1 R27.1 SP1.2 TR1.3 | length 10673.6
  Top Layer w10: C15.1 C17.2 ; C14.2@-1596.33,2104.57 -1596.33,2030 -1576.33,2010 C17.2 ; IC1.32 -1314.53,2170.47 ; IC1.19 -1286.17,2194.84 -1261.8,2170.47 ; IC1.44 -1246.8,2110 ; IC1.47 -1187.75,2110 ; IC7.4@-1123.66,1270 IC7.4 ; IC1.2 -1186.33,2111.42 -1187.75,2110 ; IC1.10 IC1.9 ; v1(-1040,2250) -1040.79,2249.21 IC1.9 ; C5.1 -965.9,2355.43 -1013.06,2308.27 IC1.12 -1168.06,2308.27 -1187.75,2288.58 -1187.75,2250 ; IC6.4@-852.41,1270 IC6.4 ; IC5.4@-581.16,1270 IC5.4 ; R25.1@-327.23,2573.47 R25.1 ; IC4.4@-309.91,1270 IC4.4 ; C17.2 -1555.9,1935.43 -1436.33,2055 -1436.33,2091.18 IC1.36 -1393.27,2091.73 -1314.53,2170.47 ; -1314.53,2170.47 -1261.8,2170.47 ; -1261.8,2170.47 -1246.8,2155.47 -1246.8,2110 ; -1246.8,2110 -1187.75,2110 ; -1187.75,2110 -1187.75,2250 ; -1187.75,2250 -1186.96,2249.21 IC1.9
  Top Layer w20: C12.2 -1625,848.58 TR1.3 -1615.43,924.57 C13.2 v1(-1615.43,1270.43) ; R20.1 v1@-1371.96,2809.37 ; IC8.4 -1391.33,1215 -1381.33,1205 -1241.33,1205 v1(-1176.33,1270) IC7.4@-1123.66,1270 ; C3.1 C2.1 ; R22.1 -895.7,2809.37 v1(-856.33,2770) -729.33,2643 C2.1 ; v1(-901.33,1270) IC6.4@-852.41,1270 ; C5.1 C4.2 C11.1 -585.9,2355.43 -521.33,2420 -521.33,2573.47 ; C18.1 v1(-660,2210) ; v1(-631.33,1270) IC5.4@-581.16,1270 ; R24.1 -151.96,2809.37 -111.33,2850 -111.33,3696.42 SP1.2 ; v1(-361.33,1270) IC4.4@-309.91,1270 ; R25.1@-327.23,2573.47 C1.1 -521.33,2573.47 ; R25.1 -321.33,2804.37 ; C2.1 -521.33,2573.47
  Top Layer w30: v1@-1371.96,2809.37 v1(-1371.33,2810)
  Bottom Layer w20: v1(-1615.43,1270.43) -1176.76,1270.43 v1(-1176.33,1270) v1(-901.33,1270) v1(-631.33,1270) v1(-361.33,1270) -296.33,1335 -296.33,1846.33 v1(-660,2210) -800,2350 -940,2350 v1(-1040,2250) ; v1(-1371.33,2810) -896.33,2810 v1(-856.33,2770) ; J5.14 J5.13 -591.33,4176.42 SP1.2
IRQ1_S1: IC3.31 J1.5 | length 594.6
  Top Layer w10: v1(-2660,1895) -2660,1893.67 -2656.49,1890.16 IC3.31
  Bottom Layer w20: v1(-2660,1895) -2510.96,1745.96 -2252.29,1745.96 J1.5
IRQ1_S2: IC7.5 J1.6 R41.1 | length 1544
  Top Layer w10: R41.1 -1095.7,1184.3
  Top Layer w20: J1.6 -1816.33,1740 -1791.33,1715 -1711.33,1715 -1471.33,1475 -1471.33,1230 -1411.64,1170.31 R41.1@-1111.02,1170.31 ; -1095.7,1184.3 -1070.08,1209.92 IC7.5
MISO_S1: IC3.39 J1.3 J4.5 J4.6 | length 2201.2
  Top Layer w10: IC3.39 -2387.43,2091.1 -2361.33,2065 -2361.33,1840 ; J1.3 -2361.33,1840 ; v1(-1970,1470) -1970,1595 -2065,1690 -2286.33,1690 -2361.33,1765 -2361.33,1840
  Bottom Layer w10: J4.5 J4.6 -2252,892 -2210,850 -2020,850 -1970,900 v1(-1970,1470)
MISO_S2: IC8.5 J1.4 R42.1 | length 1260
  Top Layer w20: J1.4 -1871.33,1840 -1776.33,1745 -1696.33,1745 -1370.7,1419.37 -1341.33,1419.37 ; IC8.5 -1341.33,1419.37 ; R42.1 -1341.33,1419.37
MOSI_S1: IC3.40 J1.9 J4.3 J4.4 | length 2220.1
  Top Layer w10: IC3.40 -2377.12,2110.79 -2321.33,2055 v1(-2321.33,1890)
  Bottom Layer w10: J1.9 -2196.33,1490 -2100,1490 -2075,1465 -2075,1140 -2152,1063 J4.3 J4.4
  Bottom Layer w20: v1(-2321.33,1890) -2575,1890 -2630,1945 -2690,1945 -2720,1915 -2720,1865 -2395,1540 J1.9
MOSI_S2: IC4.3 J1.10 | length 1929.6
  Top Layer w10: v1(-381.33,1690) v1@-374.91,1696.42
  Top Layer w20: v1@-374.91,1696.42 IC4.3
  Bottom Layer w20: J1.10 -1766.33,1540 -1736.33,1510 -561.33,1510 v1(-381.33,1690)
NetC2_2: C2.2 IC1.16 R26.2 | length 1193.3
  Top Layer w10: v1(-1241.33,2525) -1241.33,2450 -1227.12,2435.79 IC1.16 ; R26.2@-601.3,2502.6 R26.2@-596.33,2497.63
  Top Layer w20: C2.2 R26.2@-601.3,2502.6 ; v1(-596.33,2440) R26.2@-596.33,2497.63
  Bottom Layer w20: v1(-1241.33,2525) -1241.33,2405 -1221.33,2385 -1171.33,2385 -1076.33,2480 -816.33,2480 -776.33,2440 v1(-596.33,2440)
NetC3_2: C3.2 IC1.18 R27.2 | length 738.2
  Top Layer w10: IC1.18 -1266.49,2300.16 v1(-1236.33,2270) ; R27.2@-869.3,2502.6 R27.2@-866.33,2499.63
  Top Layer w20: C3.2 R27.2@-869.3,2502.6 ; v1(-866.33,2440) R27.2@-866.33,2499.63
  Bottom Layer w20: v1(-1236.33,2270) -1066.33,2440 v1(-866.33,2440)
NetC4_1: C4.1 C5.2 IC1.11 | length 382.2
  Top Layer w10: IC1.11 -890.35,2288.58 C5.2
  Top Layer w20: C5.2 C4.1
NetC7_2: C7.2 IC3.16 R29.2 | length 382
  Top Layer w10: C7.2@-2970.7,2309.37 -2870.54,2209.21 IC3.16
  Top Layer w20: R29.2 C7.2@-2970.7,2309.37
NetC8_2: C8.2 IC3.18 R30.2 | length 362.2
  Top Layer w10: C8.2@-2992.23,2129.37 C8.2 -2942.86,2123.47 -2896.49,2169.84 IC3.18
  Top Layer w20: R30.2 C8.2@-2992.23,2129.37
NetC9_1: C9.1 C10.2 IC3.11 | length 876
  Top Layer w10: IC3.11 -2754.91,2370.09 -2715,2410 -2275,2410 -2180,2505 -2180,2599.57 ; C9.1 -2180,2599.57 ; C10.2 -2180,2599.57
NetC15_2: C15.2 C17.1 IC1.42 IC1.43 | length 737.6
  Top Layer w10: C15.2 C17.1 v1(-1576.33,1800) ; v1(-1291.33,2130) -1286.17,2124.84 IC1.42 IC1.43
  Bottom Layer w20: v1(-1576.33,1800) -1576.33,1845 v1(-1291.33,2130)
NetC18_2: C18.2 IC1.41 R31.2 | length 947.1
  Top Layer w10: IC1.41 -1305.86,1979.53 -1286.33,1960 -655,1960 ; C18.2 -660,1965 -655,1960 ; R31.2 -561.33,1975 -576.33,1960 -655,1960
NetC20_2: C20.2 C21.1 IC3.42 IC3.43 | length 368.6
  Top Layer w10: IC3.42 IC3.43 -2425.16,2169.84 -2356.33,2238.67 C20.2
  Top Layer w20: C20.2 C21.1
NetC22_2: C22.2 IC3.41 R32.1 | length 656
  Top Layer w10: IC3.41 -2184.36,2130.47 C22.2 ; R32.1@-1912.23,2258.5 R32.1
  Top Layer w20: C22.2 R32.1@-1912.23,2258.5
NetIC1_20: IC1.20 Q1.1 | length 385.3
  Top Layer w10: Q1.1 -1479.32,2477.99 -1466.33,2465 -1316.33,2465 -1305.86,2454.53 IC1.20
NetIC1_21: IC1.21 Q1.2 | length 728.3
  Top Layer w10: Q1.2 -1853.34,2482.01 -1816.33,2445 -1331.33,2445 -1325.54,2439.21 IC1.21
NetIC1_31: IC1.31 IC7.3 | length 951.8
  Top Layer w10: IC1.31 -1366.17,2190.16 v1(-1341.33,2215) ; IC7.3@-1121.5,1695 IC7.3
  Top Layer w20: v1(-1181.33,1695) IC7.3@-1121.5,1695
  Bottom Layer w20: v1(-1341.33,2215) -1145,2215 -1080,2150 -1080,1796.33 v1(-1181.33,1695)
NetIC3_20: IC3.20 Q2.1 | length 410.3
  Top Layer w10: Q2.1 -3032.99,1882.01 -2926.33,1988.67 -2926.33,2105 -2900.86,2130.47 IC3.20
NetIC3_21: IC3.21 Q2.2 | length 739.8
  Top Layer w10: Q2.2 -2900,1672.99 -2900,2101.33 -2890.54,2110.79 IC3.21
NetIC4_1: IC4.1 R36.1 | length 163.8
  Top Layer w10: R36.1 R36.1@-206.33,1859.37
  Top Layer w20: IC4.1 R36.1@-206.33,1859.37
NetIC5_1: IC5.1 R37.1 | length 163.8
  Top Layer w10: R37.1@-477.58,1859.38 R37.1
  Top Layer w20: IC5.1 R37.1@-477.58,1859.38
NetIC6_1: IC6.1 R38.1 | length 164.4
  Top Layer w10: R38.1@-748.83,1858.13 R38.1
  Top Layer w20: IC6.1 R38.1@-748.83,1858.13
NetIC7_1: IC7.1 R39.1 | length 164.9
  Top Layer w10: R39.1@-1020.08,1856.88 R39.1
  Top Layer w20: IC7.1 R39.1@-1020.08,1856.88
NetIC8_1: IC8.1 R40.1 | length 165.4
  Top Layer w10: R40.1@-1291.33,1855.63 R40.1
  Top Layer w20: IC8.1 R40.1@-1291.33,1855.63
NetR1_2: R1.2 R7.1 | length 460.1
  Bottom Layer w30: R1.2 -2786.33,3100 R7.1
NetR2_2: R2.2 R8.1 | length 458
  Bottom Layer w30: R2.2 -2271.33,3095 R8.1
NetR3_2: R3.2 R9.1 | length 458
  Bottom Layer w30: R3.2 -1766.33,3095 R9.1
NetR4_2: R4.2 R10.1 | length 447.5
  Bottom Layer w30: R4.2 -1240.33,3106 R10.1
NetR5_2: R5.2 R11.1 | length 448.4
  Bottom Layer w10: R5.2 R5.2@-876.33,2975
  Bottom Layer w30: R5.2@-876.33,2975 -723.33,3128 R11.1
NetR6_2: R6.2 R12.1 | length 449.2
  Bottom Layer w10: R6.2 R6.2@-361.33,2970
  Bottom Layer w30: R6.2@-361.33,2970 -206.33,3125 R12.1
NetR13_1: R13.1 R14.2 | length 130
  Top Layer w20: R13.1 R14.2
NetR13_2: R13.2 VR1.3 | length 275.6
  Top Layer w30: R13.2 VR1.3@-3116.33,3085
NetR15_1: R15.1 R16.2 | length 126
  Top Layer w20: R15.1 R16.2
NetR15_2: R15.2 VR2.3 | length 215.1
  Top Layer w20: R15.2 -2636.33,2968.67 -2601.33,3003.67 VR2.3@-2601.33,3085
NetR17_1: R17.1 R18.2 | length 217.6
  Top Layer w20: R17.1 -2110,2770 -2070.63,2730.63 R18.2
NetR17_2: R17.2 VR3.3 | length 200.4
  Top Layer w30: R17.2 -2110,2960 -2086.33,2983.67 VR3.3@-2086.33,3085
NetR19_1: R19.1 R20.2 | length 128
  Top Layer w20: R19.1 R20.2
NetR19_2: R19.2 VR4.3 | length 277.7
  Top Layer w30: VR4.3@-1571.33,3085 -1571.33,2814.37 R19.2
NetR21_1: R21.1 R22.2 | length 134
  Top Layer w20: R21.1 R22.2
NetR21_2: R21.2 VR5.3 | length 275.6
  Top Layer w30: R21.2 v1(-1056.33,2920)
  Bottom Layer w20: v1(-1056.33,2920) VR5.3@-1056.33,3085
NetR23_1: R23.1 R24.2 | length 130
  Top Layer w20: R23.1 R24.2
NetR23_2: R23.2 VR6.3 | length 966.9
  Top Layer w20: VR6.3@-541.33,3085 -231.33,3085 -146.33,3000 -146.33,2900 -171.33,2875 -486.33,2875 -536.33,2825 R23.2
SDI_S2: IC1.39 IC8.3 | length 396.4
  Top Layer w10: IC8.3 -1391.33,1760 -1431.33,1800 -1431.33,1890 -1345.23,1976.1 IC1.39
SDO_S2: IC1.40 IC4.5 R33.1 | length 2136.2
  Top Layer w10: IC1.40 -1325.54,1964.21 -1301.33,1940 -191.33,1940 -161.33,1910 -161.33,1515 -256.33,1420 IC4.5 ; R33.1 R33.1@-256.33,1089.37
  Top Layer w20: R33.1@-256.33,1089.37 IC4.5
supply1_P1: D1.1 D2.1 D3.1 SP2.1 | length 922.8
  Top Layer w20: D1.1 D2.1 ; SP2.1 -3040,3897.75 -3040,4392.96 D2.1 ; D3.1 D2.1
supply2_P1: D4.1 D5.1 D6.1 SP1.1 | length 753.6
  Top Layer w20: D4.1 D5.1 D6.1 -181.33,4360 -111.33,4290 -111.33,4119.88 SP1.1
V1in_S1: D3.2 J2.1 J2.2 R1.1 | length 1344.4
  Top Layer w20: R1.1 -2931.33,4216.67 J2.1 J2.2
  Top Layer w30: D3.2 -2868.71,4560.71 J2.2
V1in_S2: D6.2 J5.1 J5.2 R4.1 | length 2476.5
  Top Layer w30: J5.2 -1191.33,4565 -1036.33,4720 -266.33,4720 -181.33,4635 D6.2
  Bottom Layer w20: R4.1 -1191.33,3555 J5.1 J5.2
V1mea_S1: IC3.13 R7.2 VR1.2 | length 1310.6
  Top Layer w10: IC3.13 -2825.78,2915.55 R7.2
  Bottom Layer w20: VR1.2@-3116.33,3185 -3116.33,3176.33 -3046.33,3106.33 -3046.33,2910 -3016.33,2880 -2861.33,2880 R7.2
V1mea_S2: IC1.13 R10.2 VR4.2 | length 1276
  Top Layer w10: R10.2 -1161.33,2940 -1131.33,2910 -1131.33,2425 -1168.06,2388.27 IC1.13
  Bottom Layer w20: VR4.2@-1571.33,3185 -1476.33,3090 -1476.33,2915 -1436.33,2875 -1305.33,2875 R10.2
V1N: C6.2 IC3.14 R28.2 | length 536.9
  Top Layer w10: C6.2@-2978.3,2489.37 -2976.33,2487.4 -2938.73,2487.4 -2896.33,2445 -2896.33,2280 -2864.91,2248.58 IC3.14
  Top Layer w20: R28.2 C6.2@-2978.3,2489.37
V2in_S1: D2.2 J2.5 J2.6 R2.1 | length 1786.9
  Top Layer w20: J2.6 J2.5 -2578,3521.67 R2.1
  Top Layer w30: D2.2 -3046.33,4600 -2996.33,4650 -2758,4650 J2.6
V2in_S2: D5.2 J5.5 J5.6 R5.1 | length 2039.9
  Top Layer w30: J5.6 -991.33,4555 -886.33,4660 -356.33,4660 -321.33,4625 D5.2
  Bottom Layer w20: J5.6 J5.5 -991.33,3470 R5.1
V2mea_S1: IC3.15 R8.2 VR2.2 | length 1772.8
  Top Layer w10: IC3.15 -2775.23,2228.9 -2756.33,2210 v1(-2751.33,2210)
  Bottom Layer w20: v1(-2751.33,2210) -2835,2293.67 -2835,2676.33 -2691.33,2820 -2691.33,3095 -2601.33,3185 -2501.33,3085 -2501.33,2920 -2461.33,2880 -2346.33,2880 R8.2
V2mea_S2: IC1.15 R11.2 VR5.2 | length 1371.2
  Top Layer w10: IC1.15 -1207.43,2500.01 -1210,2502.57 -1210,2871.33 v1(-1206.33,2875)
  Bottom Layer w20: v1(-1206.33,2875) -976.33,2875 ; VR5.2@-1056.33,3185 -976.33,3105 -976.33,2875 ; R11.2 -788.33,2875 -976.33,2875
V2N: C1.2 IC1.14 R25.2 | length 1240.1
  Top Layer w10: IC1.14 -1187.75,2423.58 -1170,2441.33 v1(-1170,2515) ; R25.2@-323.3,2502.6 R25.2
  Top Layer w20: C1.2 R25.2@-323.3,2502.6 ; v1(-321.33,2440) R25.2
  Bottom Layer w20: v1(-1170,2515) -396.33,2515 v1(-321.33,2440)
V3in_S1: D1.2 J2.9 J2.10 R3.1 | length 2415.2
  Top Layer w20: J2.10 J2.9 -2378,3706.67 -2026.33,3355 R3.1
  Top Layer w30: D1.2 -3186.33,4600 -3076.33,4710 -2546.33,4710 -2378,4541.67 J2.10
V3in_S2: D4.2 J5.9 J5.10 R6.1 | length 1687.9
  Top Layer w30: J5.10 -791.33,4525 -755.62,4560.71 D4.2
  Bottom Layer w20: J5.10 J5.9 -791.33,3785 R6.1
V3mea_S1: IC3.17 R9.2 VR3.2 | length 2246.1
  Top Layer w10: IC3.17 -2775.86,2189.53 -2751.33,2165 v1(-2736.33,2165)
  Bottom Layer w20: v1(-2736.33,2165) -2275,2165 -2181.33,2258.67 -2181.33,3090 -2086.33,3185 -2006.33,3105 -2006.33,2925 -1956.33,2875 -1846.33,2875 R9.2
V3mea_S2: IC1.17 R12.2 VR6.2 | length 2013.8
  Top Layer w10: v1@-1273.83,2482.5 -1273.83,2442.5 -1246.8,2415.47 IC1.17
  Top Layer w20: v1@-1273.83,2482.5 -1316.33,2525 -1316.33,2965 -1266.33,3015 -656.33,3015 ; VR6.2@-541.33,3185 -656.33,3070 -656.33,3015 ; R12.2 -281.33,3015 -656.33,3015
  other v1: -1276.33,2480
pads on no net: IC1.3 IC1.4 IC1.5 IC1.6 IC1.7 IC1.8 IC1.22 IC1.23 IC1.24 IC1.25 IC1.26 IC1.27 IC1.28 IC1.29 IC1.30 IC1.35 IC1.45 IC1.46 IC3.3 IC3.4 IC3.5 IC3.6 IC3.7 IC3.8 IC3.22 IC3.23 IC3.24 IC3.25 IC3.26 IC3.27 IC3.28 IC3.29 IC3.30 IC3.35 IC3.45 IC3.46 IC4.2 IC5.2 IC6.2 IC7.2 IC8.2 J2.3 J2.4 J2.7 J2.8 J2.11 J2.12 J3.11 J3.12 J4.7 J4.8 J4.9 J4.10 J4.11 J4.12 J4.13 J4.14 J5.3 J5.4 J5.7 J5.8 J5.11 J5.12 J6.7 J6.8 VR1.1 VR2.1 VR3.1 VR4.1 VR5.1 VR6.1

## Keep-outs
Keep-Out Layer:
  the board outline again, w12.01

## Other copper
Bottom Layer:
  rectangle: -496.33,140 -161.33,520
  rectangle: -3206.33,135 -2871.33,515
  rectangle: -496.33,4855 -161.33,5235
  rectangle: -3206.33,4855 -2871.33,5235

## Silkscreen, mask and mechanical layers (free items; w line width, h text height)
Top Overlay:
  circle w10: c-221.33,3593.7 r58.67
  circle w10: c-221.33,4200 r55.64
  circle w10: c-1378.81,3798.42 r55.05
  circle w10: c-1378.81,3995.28 r56.69
  lines w8: -1325,3780 -1040,3860 ; -1322.12,3995.28 -1040,3940 ; -640,3855 -280,3610 ; -640,3940 -275,4175 ; -1040,3850 -1040,3945 -640,3945 -640,3850 -1040,3850
  lines w10: -2361.68,1120 -2016.02,1120 -2016.02,2140 -2246.33,2140 -2361.68,2140 -2361.68,1120
  text "CONVERTER" at -1010,3875 h40
Bottom Solder:
  rectangle: -496.33,140 -161.33,520
  rectangle: -3206.33,135 -2871.33,515
  rectangle: -496.33,4855 -161.33,5235
  rectangle: -3206.33,4855 -2871.33,5235

## Dimensions
-2352,945 to -3366.33,0 on Bottom Solder
-1017,945 to 0,0 on Bottom Solder
0,5314.96 to -101.33,5220 on Mechanical 1
-3366.33,5314.96 to -3266.33,5245 on Mechanical 1

## Text inside footprints (layer, text, board x,y; h text height)
J2: Top Overlay "14" at -2113,4455 h40; Top Overlay "1" at -2858,4350 h40; Mechanical 14 "14" at -2113,4455 h40; Mechanical 14 "1" at -2858,4350 h40
J3: Top Overlay "14" at -1319.66,4455 h40; Top Overlay "1" at -2064.66,4350 h40; Mechanical 14 "14" at -1319.66,4455 h40; Mechanical 14 "1" at -2064.66,4350 h40
J4: Top Overlay "1" at -1985,1030 h40; Top Overlay "14" at -2770,920 h40; Mechanical 14 "1" at -1972,1065 h40 r180; Mechanical 14 "14" at -2717,960 h40 r180
J5: Top Overlay "14" at -526.33,4455 h40; Top Overlay "1" at -1271.33,4350 h40; Mechanical 14 "14" at -526.33,4455 h40; Mechanical 14 "1" at -1271.33,4350 h40
J6: Top Overlay "1" at -650,1025 h40; Top Overlay "14" at -1430,915 h40; Mechanical 14 "1" at -637,1065 h40 r180; Mechanical 14 "14" at -1382,960 h40 r180
TR1: Mechanical 14 "+Vout" at -1510.24,965 h29.53 r90; Mechanical 14 "-Vout" at -1610.24,965 h29.53 r90; Mechanical 14 "+Vin" at -1710.24,965 h29.53 r90; Mechanical 14 "-Vin" at -1810.24,965 h29.53 r90; Mechanical 14 "4" at -1510.24,854.63 h29.53 r90; Mechanical 14 "1" at -1810.24,859.55 h29.53 r90